# Altium PCB mar6_pcb.PcbDoc
Units mm, origin at the board's own origin, x right, y up, seen from the top; angles counter-clockwise.
Board outline 13.4 x 13.4 mm, 4 copper layers (Top Layer, Layer 1, Layer 2, Bottom Layer 1), stack 0.775 mm thick; 10 components, 8 nets, 23 pads, 53 vias.
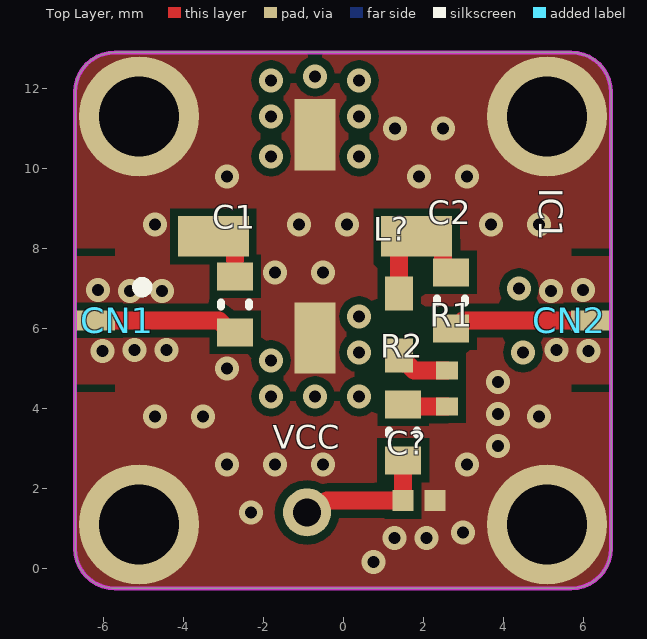
[diagram p0: Top Layer view]
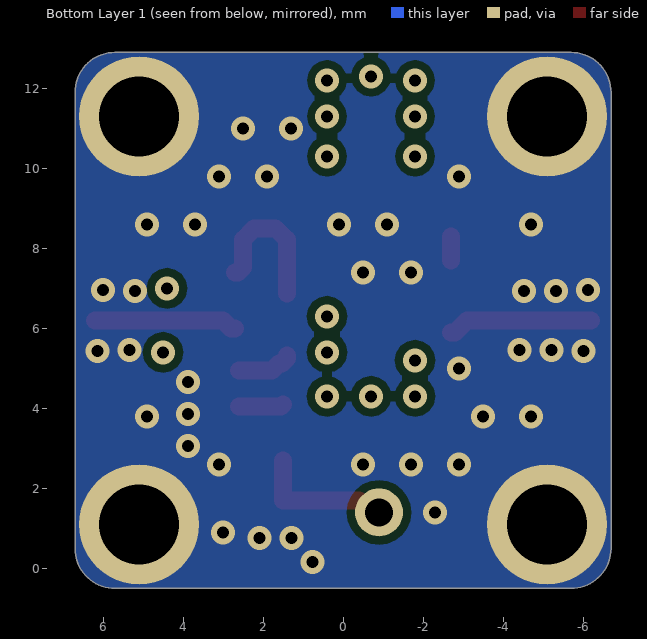
[diagram p1: Bottom Layer 1 view, seen from below]
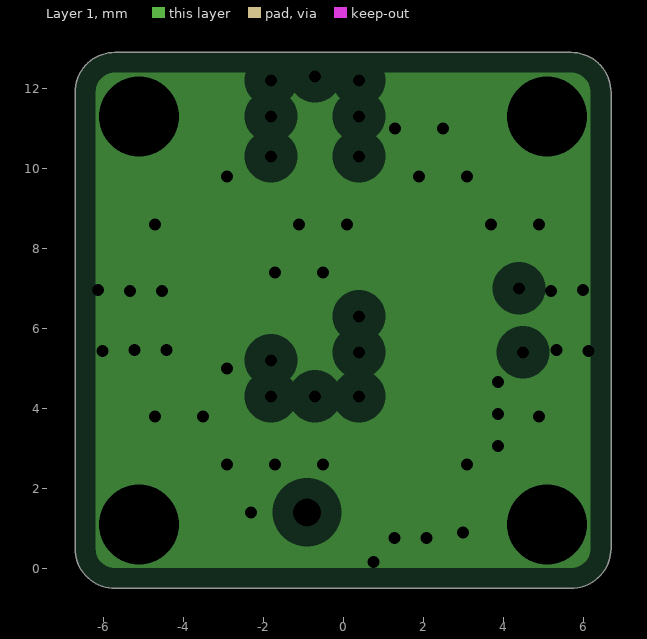
[diagram p2: Layer 1, clearances drawn from the general rule]
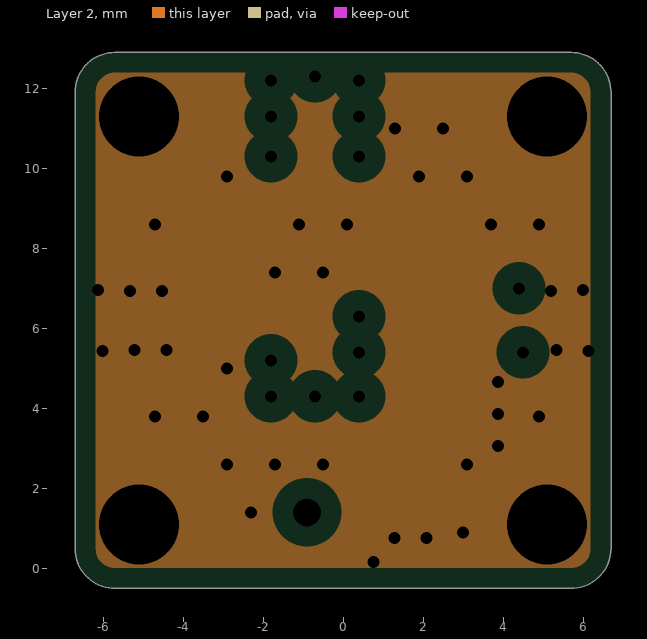
[diagram p3: Layer 2, clearances drawn from the general rule]

## Layer stack, top to bottom
Top Solder: solder mask 0.0102, Solder Resist, Dk 3.5
Top Layer: signal copper 0.035
Dielectric 2: prepreg 0.254, PP-006, Dk 4.1
Layer 1: plane copper 0.035, net GND
Dielectric 1: dielectric 0.127, FR-4, Dk 4.8
Layer 2: plane copper 0.035, net GND
Dielectric 3: prepreg 0.254, PP-006, Dk 4.1
Bottom Layer 1: signal copper 0.035
Bottom Solder: solder mask 0.0102, Solder Resist, Dk 3.5

## Board outline
-6.7,0.5 -6.7,11.9 cw(c-5.7,11.9) -5.7,12.9 5.7,12.9 cw(c5.7,11.9) 6.7,11.9 6.7,0.5 cw(c5.7,0.5) 5.7,-0.5 -5.7,-0.5 cw(c-5.7,0.5)

## Design rules (kind name [scope] priority, off if disabled: settings)
Clearance [All] p1: gap=0.2 ignorepadtopadclearanceinfootprint=FALSE
HoleSize [All] p1: absolutevalues=TRUE maxlimit=5 minlimit=0.3 maxpercent=80.000 minpercent=20.000
PlaneClearance [All] p1: clearance=0.508
PlaneConnect [All] p1: planeconnectstyle=Direct reliefexpansion=0.508 reliefentries=4 reliefconductorwidth=0.254 reliefairgap=0.254
PolygonConnect [All] p1: connectstyle=Direct reliefconductorwidth=0.254 reliefentries=4 polygonreliefangle="90 Angle" airgapwidth=0.254
RoutingVias [All] p1: holewidth=0.711 width=1.27 viastyle="Through Hole" minholewidth=0.711 minwidth=1.27 maxholewidth=0.711 maxwidth=1.27 useviatemplates=TRUE viatemplateguid#1={64ED2267-9B4A-4FB7-8E94-0754CE4262B1} viatemplatename#1=v60h30m0mx0
SolderMaskExpansion [All] p1: expansion=0.102
Width Width_50ohm [InNetClass('50ohm')] p1: maxlimit=0.45 minlimit=0.45 preferedwidth=0.45 impedanceprofiledriven=TRUE impedanceprofileid={D2B77361-9B7D-4BD5-B69E-70E315500705} impedanceprofilevalue=50.000000 minimp=50.000000 maximp=50.000000 favimp=50.000000 checkconnectedcopper=TRUE
Width [All] p2: maxlimit=5 minlimit=0.2 preferedwidth=0.2
27 further rules are at their usual default settings.

## Components (designator, comment, footprint, x,y, rotation, side; value= is the part's Value field where it differs from the comment)
C1 "2200pF" CAPC0603(1608)55_L -2.7,6.6 r90 top
C2 "2200pF" CAPC0603(1608)55_L 2.7,6.7 r270 top
C? "100nF" 0402-CAP 1.9,1.7 r0 top value=100n
CN1 "X-CONNECTOR" X-CONNECTOR-PCB -5.1,11.3 r0 top
CN2 "X-CONNECTOR" X-CONNECTOR-PCB 5.1,1.1 r180 top
IC1 "MAR-6+" "New footprint 1"#1 -0.7,8.3 r270 top
L? "1uH" 0603-IND 1.4,6.1 r270 top
R1 "8R25" 0402-RES-HD 2.6,4.5 r270 top
R2 "560R" 0603-RES-HD 1.5,3.4 r270 top
VCC "TEST_VIA_RF" "New footprint 1"#2 -0.9,1.4 r90 top

## Footprints (in the part's own frame and the unit in brackets; to place one, negate y for a bottom-side part, rotate by r counter-clockwise, add the part's x,y. Pads: shape width x height; smd on the part's side, far side on the other; paste and mask are expansions set on the pad)
0402-CAP [mm] "Chip Capacitor, Body 1.0x0.5mm, Height 0.6mm, IPC Medium Density"
  rect 0.52x0.52 smd: 1(-0.4,0) 2(0.4,0)
  body extent -0.55,-0.3 0.55,0.3, height 0.33
0402-RES-HD [mm] "Chip Resistor, Body 1.0x0.5mm, IPC High Density"
  rect 0.45x0.55 smd: 1(-0.45,0) 2(0.45,0)
  body extent -0.52,-0.27 0.53,0.28, height 0.4
0603-IND [mm] "Chip Inductor, 2-Leads, Body 1.6x0.8mm"
  rect 0.85x0.7 smd: 1(-0.775,0) 2(0.775,0)
  body extent -0.8,-0.4 0.8,0.4, height 0.79
0603-RES-HD [mm] "Chip Resistor, Body 1.6x0.8mm, IPC High Density"
  rect 0.7x0.9 smd: 1(-0.7,0) 2(0.7,0)
  silkscreen extent -0.05,-0.35 0.05,0.35, body extent -0.85,-0.47 0.85,0.47, height 0.6
CAPC0603(1608)55_L [mm] "Chip Capacitor, Body 1.6x0.8mm, Height 0.55mm, IPC High Density"
  rect 0.7x0.9 smd: 1(-0.7,0) 2(0.7,0)
  silkscreen extent -0.05,-0.35 0.05,0.35, body extent -0.87,-0.47 0.88,0.48, height 0.55
"New footprint 1"#1 [mil]
  rect 40x70 smd: 1(0,-100) 3(0,100)
  rect 70x40 smd: 2(100,0) 4(-100,0)
  silkscreen extent 45,-175 55,-165, body extent -92,-90 92,92, height 64
"New footprint 1"#2 [mil]
  round 47.24 hole 27.56: 1(0,0)
X-CONNECTOR-PCB [mm]
  rect 1x0.5 smd: 1(-1.1,-5.1)
  round 3 hole 2: M1(0,0) M2(0,-10.2)
  Top Layer pour cut-out: -1.616,-3.576
  Top Layer pour cut-out: -1.6,-3.5 -0.6,-3.5 -0.6,-3.3 -1.6,-3.3
  Top Layer pour cut-out: -0.6,-6.7 -1.6,-6.7 -1.6,-6.9 -0.6,-6.9

## Part data
C1 C2: library part C0603-2200pF-1, "CAP CER 2200PF 50V NP0 0603", Part No=C0603C222F5GACTU, Cod EMS=05.281.019.533
C?: library part CC0402-100nF-A.12, "CAP CER 0.1UF 10V 20% X5R 0402", Part No=VJ0402V104ZXQPBC, Cod EMS=05.281.006.133
CN1 CN2: library part X-CONNECTOR-5, "CONECTOR PARA MÓDULOS X MICROWAVE", Mount=TH, RoHS=Yes
IC1: library part MAR-6+-01.A.1, "Wideband Amplifier 21.8dB typ. at 0.1 GHz low noise figure, 2.3 dB typ."
L?: library part MLF1608A1R0KTA00-1, "Fixed Inductors 1.0 UH 10%", Part No=MLF1608A1R0KTA00
R1: library part "8R25 0402-01.A.1", "Thick Film Resistors - SMD 1/16watt 8.25ohms 1%"
R2: library part R0603-560R-1, "RES SMD 560 OHM 0.1% 1/10W 0603", Part No=TNPW0603560RBEEA, Family=TNPW0603....BEEA, Family Description="RESISTOR FILME FINO 10R-332K / 1/10W / 0,1% / 25PPM /  0603. P/N: TNPW0603....BEEA – VISHAY DALE."
VCC: library part TEST_VIA_RF-01.A.1, "Test VIA for RF circuits"

## Via types
v1: diameter 0.6, hole 0.3, Top Layer to Bottom Layer 1, tented both sides, 32 vias
v2: diameter 0.6, hole 0.3, Top Layer to Bottom Layer 1, 21 vias

## Nets (pads, with @x,y where several pads share a name; then routed paths per layer and width w, separated by ;. In a path a pad name is that pad's centre, name@x,y a point inside that pad or via, vN(x,y) a via of type N, cw(c..) or ccw(c..) an arc to the next point about the centre after c; other vN are vias at no path point)
GND: C?.2 CN1.M1 CN1.M2 CN2.M1 CN2.M2 IC1.2 IC1.4
  other v1: 0.76,0.161 1.289,0.761 2.089,0.764 3,0.9 3.875,3.065 3.875,3.865 3.875,4.665 -6.007,5.44 6.135,5.44 -5.207,5.461 -4.407,5.461 5.335,5.461 -5.328,6.939 -4.528,6.939 5.199,6.939 -6.128,6.96 5.999,6.96
  other v2: -2.3,1.4 -2.9,2.6 -1.7,2.6 -0.5,2.6 3.1,2.6 -4.7,3.8 -3.5,3.8 4.9,3.8 -2.9,5 -1.7,7.4 -0.5,7.4 -4.7,8.6 -1.1,8.6 0.1,8.6 3.7,8.6 4.9,8.6 -2.9,9.8 1.9,9.8 3.1,9.8 1.3,11 2.5,11
NetC1_1: C1.1 CN1.1 | length 3.6
  Top Layer w0.45: CN1.1 -5.2,6.2 -3.1,6.2 -2.925,6.025 -2.8,5.9 C1.1
NetC1_2: C1.2 IC1.1 | length 0.6
  Top Layer w0.45: -2.7,7.7 IC1.1@-2.7,8.3
NetC2_1: C2.1 IC1.3 L?.1 | length 3.6
  Top Layer w0.45: L?.1 1.4,8.217 1.683,8.5 1.84,8.5 2.221,8.5 2.504,8.217 2.504,7.525 2.629,7.4 C2.1
NetC2_2: C2.2 CN2.1 | length 3.6
  Top Layer w0.45: C2.2 2.8,6 3,6.2 CN2.1
NetC?_1: C?.1 R2.2 VCC.1 | length 3.5
  Top Layer w0.45: VCC.1 -0.697,1.4 -0.397,1.7 C?.1 R2.2
NetL?_2: L?.2 R1.1 | length 1.4
  Top Layer w0.45: L?.2 1.4,5.25 1.525,5.125 1.6,5.125 1.775,4.95 R1.1
NetR1_2: R1.2 R2.1 | length 1.1
  Top Layer w0.45: R2.1 1.55,4.05 R1.2
copper on no net:
  other v1: -1.8,4.3 -0.7,4.3 0.4,4.3 -1.8,5.2 0.4,5.4 4.5,5.4 0.4,6.3 4.4,7 -1.8,10.3 0.4,10.3 -1.8,11.3 0.4,11.3 -1.8,12.2 0.4,12.2 -0.7,12.3

## Polygon pours and split planes (outlines as drawn)
GND on Bottom Layer 1 "Bottom Layer 1-GND" (solid, pour order 3): -5.7,-0.5 cw(c-5.7,0.5) -6.7,0.5 -6.7,11.9 cw(c-5.7,11.9) -5.7,12.9 5.7,12.9 cw(c5.7,11.9) 6.7,11.9 6.7,0.5 cw(c5.7,0.5) 5.7,-0.5
GND on Top Layer "Top Layer-GND" (solid, pour order 5): -5.7,-0.5 cw(c-5.7,0.5) -6.7,0.5 -6.7,11.9 cw(c-5.7,11.9) -5.7,12.9 5.7,12.9 cw(c5.7,11.9) 6.7,11.9 6.7,0.5 cw(c5.7,0.5) 5.7,-0.5
GND on Layer 1 (split plane): 5.796,12.382 5.888,12.354 5.973,12.309 6.048,12.248 6.109,12.173 6.154,12.088 6.182,11.996 6.191,11.912 6.19,11.9 6.19,0.5 6.191,0.488 6.182,0.404 6.154,0.312 6.109,0.227 6.048,0.152 5.973,0.091 5.888,0.046 5.796,0.018 5.712,0.009 5.7,0.01 -5.7,0.01 -5.712,0.009 -5.796,0.018 -5.888,0.046 -5.973,0.091 -6.048,0.152 -6.109,0.227 -6.154,0.312 -6.182,0.404 -6.191,0.488 -6.19,0.5 -6.19,11.9 -6.191,11.912 -6.182,11.996 -6.154,12.088 -6.109,12.173 -6.048,12.248 -5.973,12.309 -5.888,12.354 -5.796,12.382 -5.712,12.391 -5.7,12.39 5.7,12.39 5.712,12.391
GND on Layer 2 (split plane): 5.796,12.382 5.888,12.354 5.973,12.309 6.048,12.248 6.109,12.173 6.154,12.088 6.182,11.996 6.191,11.912 6.19,11.9 6.19,0.5 6.191,0.488 6.182,0.404 6.154,0.312 6.109,0.227 6.048,0.152 5.973,0.091 5.888,0.046 5.796,0.018 5.712,0.009 5.7,0.01 -5.7,0.01 -5.712,0.009 -5.796,0.018 -5.888,0.046 -5.973,0.091 -6.048,0.152 -6.109,0.227 -6.154,0.312 -6.182,0.404 -6.191,0.488 -6.19,0.5 -6.19,11.9 -6.191,11.912 -6.182,11.996 -6.154,12.088 -6.109,12.173 -6.048,12.248 -5.973,12.309 -5.888,12.354 -5.796,12.382 -5.712,12.391 -5.7,12.39 5.7,12.39 5.712,12.391

## Keep-outs
Top Layer:
  the board outline again, w0.1

## Silkscreen, mask and mechanical layers (free items; w line width, h text height)
Mechanical 1:
  the board outline again, w0.2